# Altium PCB SG6841 12V 3A_2020-11-24_11-49-51.pcbdoc
Units mil, origin at the board's own origin, x right, y up, seen from the top; angles counter-clockwise.
Board outline 4160 x 3770 mil, 2 copper layers (Top Layer, Bottom Layer); 39 components, 40 nets, 97 pads, 0 vias.
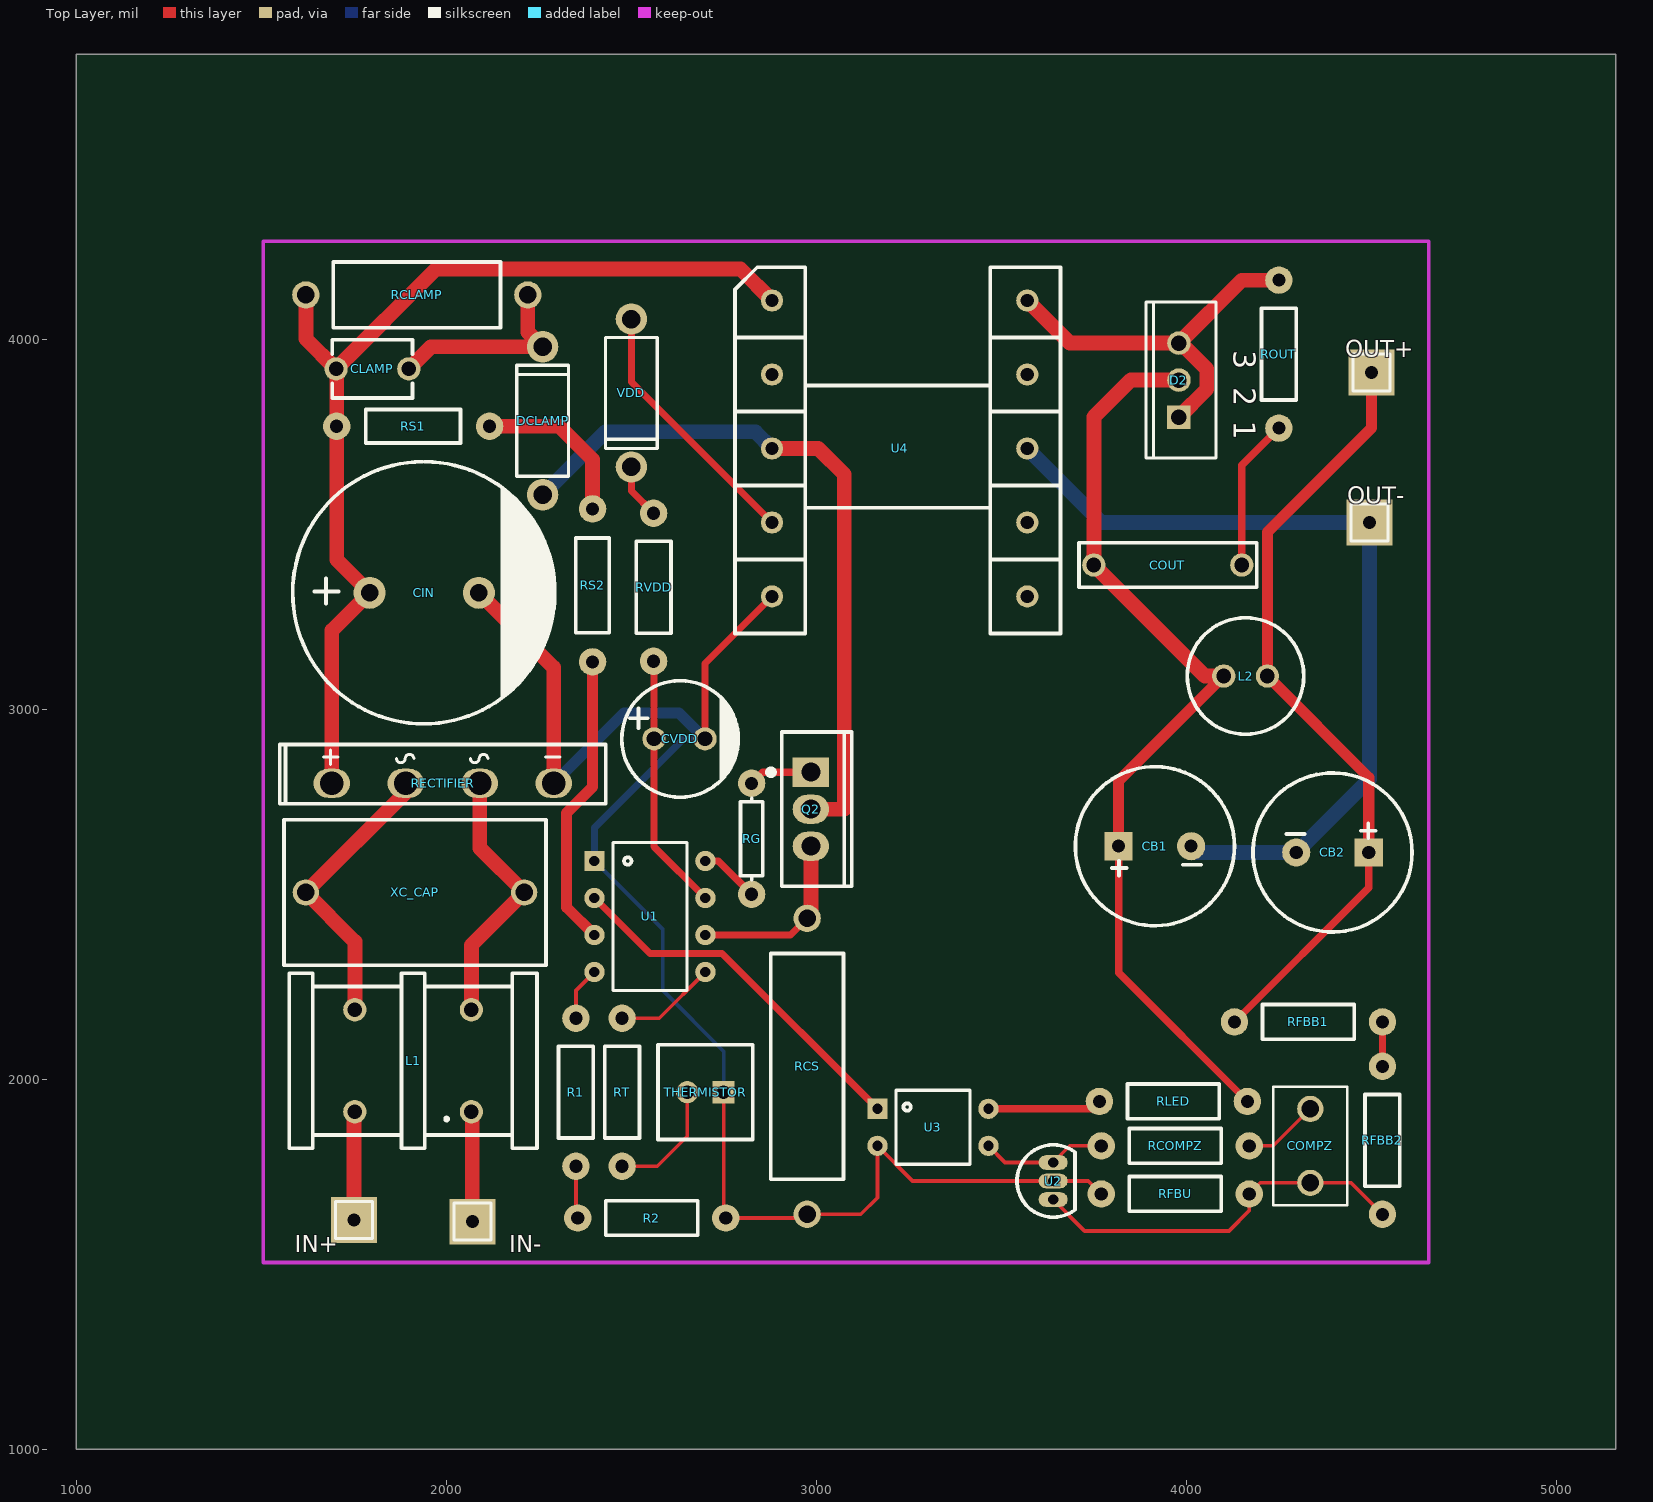
[diagram p0: Top Layer view]
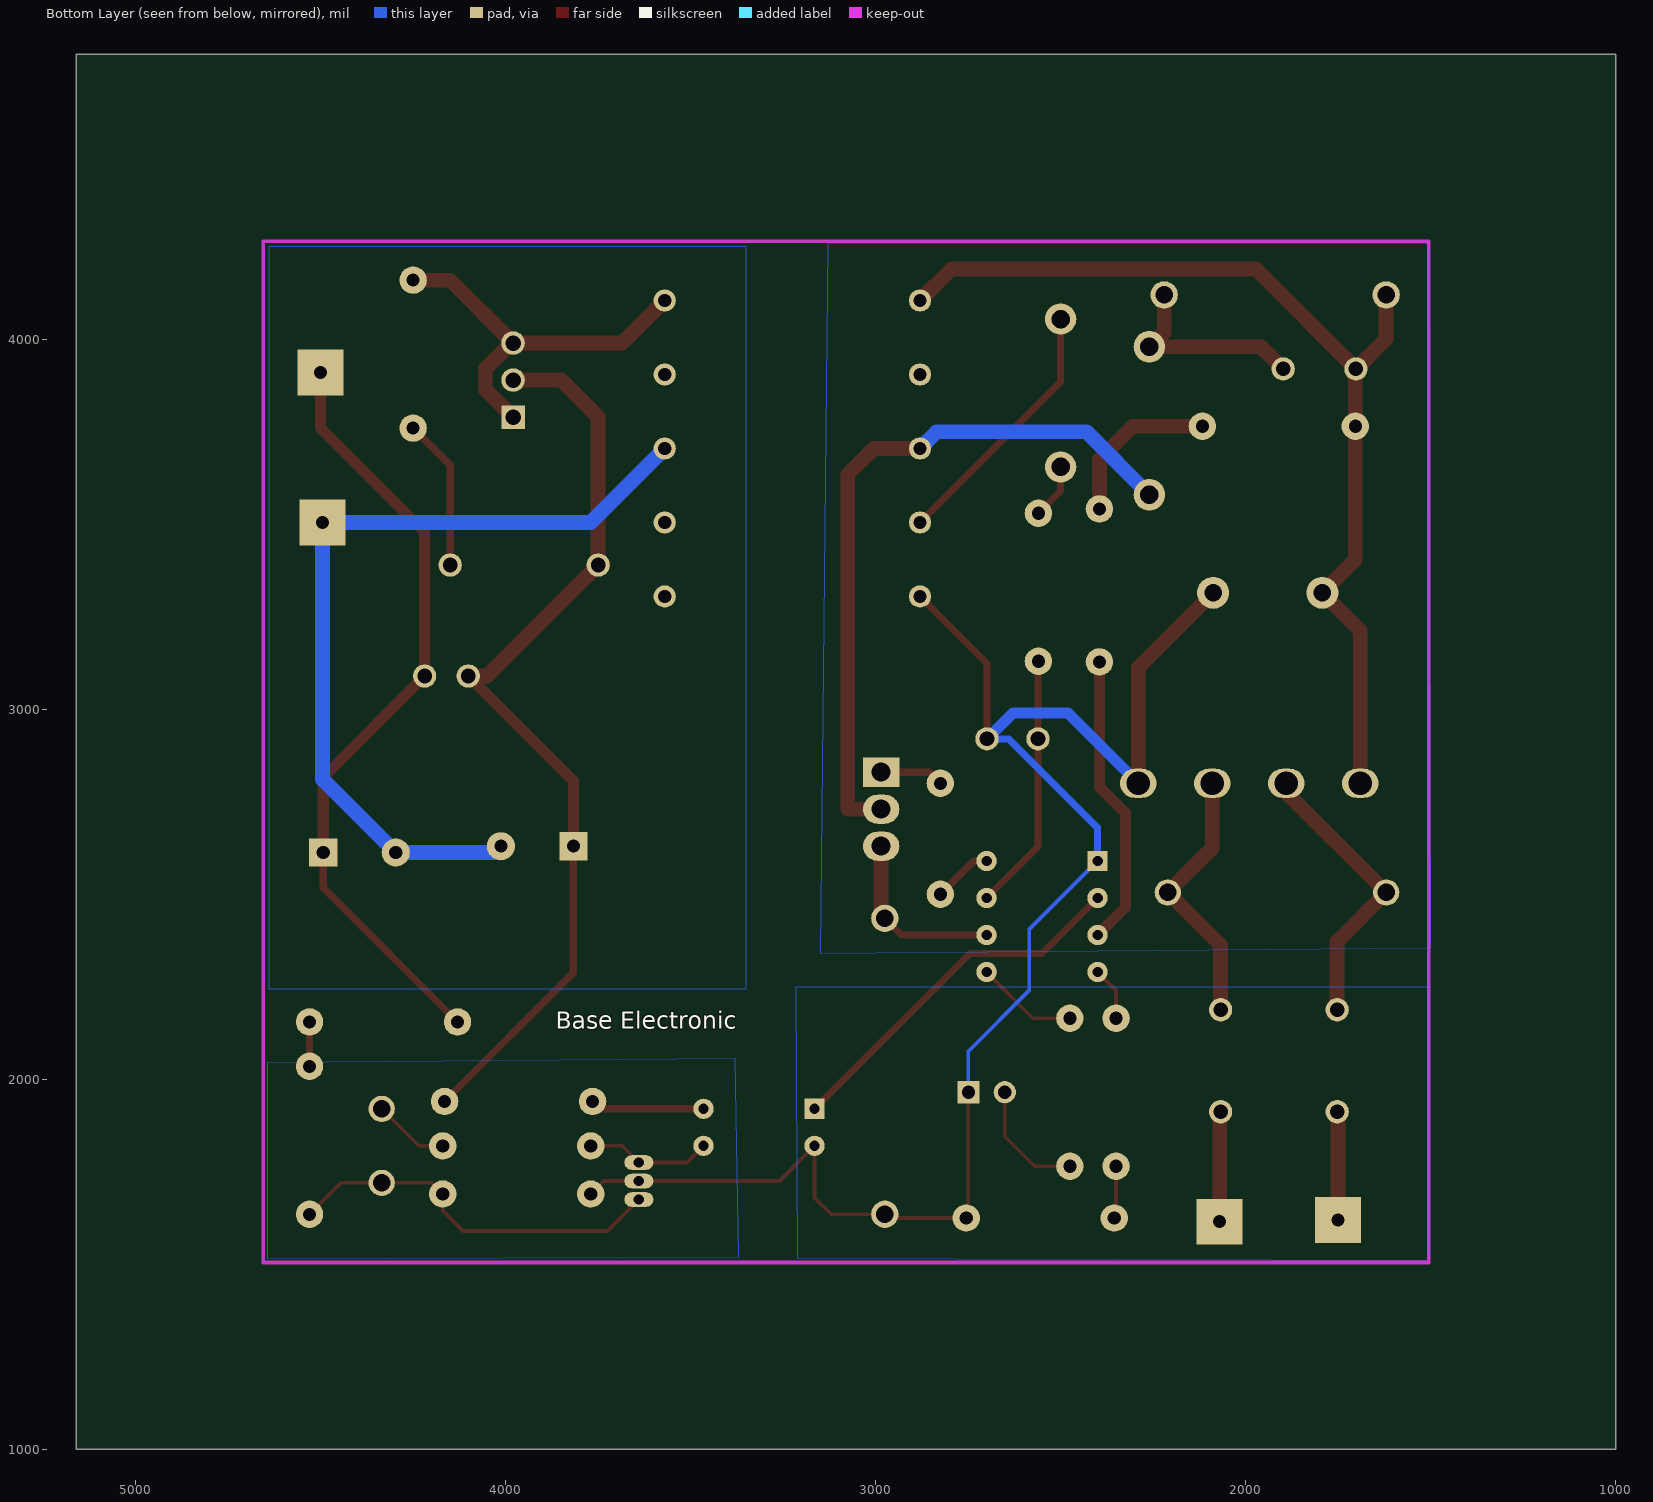
[diagram p1: Bottom Layer view, seen from below]

## Layer stack, top to bottom
Top Layer: signal copper (thickness not stored)
Dielectric: dielectric 12.6, FR-4, Dk 4.8
Bottom Layer: signal copper (thickness not stored)

## Board outline
5160,1000 1000,1000 1000,4770 5160,4770

## Components (designator, comment, footprint, x,y, rotation, side; value= is the part's Value field where it differs from the comment)
CB1 "1000UF" CPOL-RADIAL-1000UF-25V-KIT 3915,2630 r180 top
CB2 "1000UF" CPOL-RADIAL-1000UF-25V-KIT 4395,2613 r0 top
CIN "100uF" CAP-TH_BD18.0-P7.50-D1.2-FD 1940,3315 r0 top
CLAMP "222（2200pF）2KV" CAP-TH_L5.0-W4.0-P5.00-D1.0-FD 1800,3920 r180 top
COMPZ "100nF" RAD-0.2 4335,1820 r0 top
COUT "1000pF" CAP-12*3-10MM 3950,3390 r180 top
CVDD "220uF" CAP-TH_BD8.0-P3.50-D1.0-FD 2630,2920 r0 top
D2 "MBR20100CT-E3/4W" TO-220AB(TO-220-3) 3980,3890 r0 top
DCLAMP "FR157" DO-15 2260,3780 r90 top
IN+ "Header-Male" HDR-1X1/2.54 1750,1620 r0 top
IN- "Header-Male" HDR-1X1/2.54 2070,1615 r0 top
L1 "20mH" FILTER-TH_4P-L17.0-W12.0-P7.00-D0.6-S8.00 1910,2050 r90 top
L2 "10mH" IND-TH_BD8.0-P3.00-D0.6 4160,3090 r0 top
OUT+ "Header-Male2.1" HDR-1X1/2.54 4500,3910 r0 top
OUT- "Header-Male2" HDR-1X1/2.54 4495,3505 r0 top
Q2 "10N65" TO-220F(TO-220IS) 2985,2730 r0 top
R1 "16k" AXIAL-0.4 2350,1965 r90 top
R2 "10k" AXIAL-0.4 2555,1625 r180 top
RCLAMP "100k" AXIAL-0.6 1920,4120 r180 top
RCOMPZ "12k" AXIAL-0.4 3970,1820 r0 top
RCS "0.39" AXIAL-0.8 2975,2035 r90 top
RECTIFIER "GBU406" BRIDGE-GBU 1990,2800 r270 top
RFBB1 "36k" AXIAL-0.4 4330,2155 r180 top
RFBB2 "2.2k" AXIAL-0.4 4530,1835 r90 top
RFBU "10k" AXIAL-0.4 3970,1690 r0 top
RG "10" AXIAL-0.3 2825,2650 r90 top
RLED "1k" AXIAL-0.4 3965,1940 r0 top
ROUT "22" AXIAL-0.4 4250,3960 r270 top
RS1 "750K" RES-TH_BD2.3-L6.5-P10.50-D0.5 1910,3765 r180 top
RS2 "750K" RES-TH_BD2.3-L6.5-P10.50-D0.5 2395,3335 r90 top
RT "6.2k" AXIAL-0.4 2475,1965 r90 top
RVDD "4.7" AXIAL-0.4 2560,3330 r90 top
THERMISTOR "104K" RES-TH_L6.5-W4.0-P2.50-D0.5 2700,1965 r180 top
U1 "SG6841" DIP8 2400,2590 r270 top
U2 "TL431" TO-92(TO-92-3) 3640,1725 r180 top
U3 "PC817C" DIP4 3315,1870 r270 top
U4 "EE28_10_PIN" TRANSFORMER_EE28_10PIN 3570,4105 r0 top
VDD "FR157" DO-15 2500,3855 r270 top
XC_CAP "470nF" CAP-SAFE-18.0*10.0 1915,2505 r180 top

## Footprints (in the part's own frame and the unit in brackets; to place one, negate y for a bottom-side part, rotate by r counter-clockwise, add the part's x,y. Pads: shape width x height; smd on the part's side, far side on the other; paste and mask are expansions set on the pad)
AXIAL-0.3 [mil]
  round 74 hole 35.4: 1(-150,0) 2(150,0)
  silkscreen extent -110,-30 110,30
AXIAL-0.4 [mil]
  round 74 hole 35.4: 1(-200,0) 2(200,0)
  silkscreen extent -124,-47 124,47
AXIAL-0.6 [mil]
  round 74 hole 47.2: 1(-300,0) 2(300,0)
  silkscreen extent -226,-89 226,89
AXIAL-0.8 [mil]
  round 74 hole 47.2: 1(-400,0) 2(400,0)
  silkscreen extent -305,-98 305,98
BRIDGE-GBU [mm]
  oval 2x2.5 hole 1.6: 1(0,2.54) 2(0,-7.62) 3(0,-2.54) 4(0,7.62)
  silkscreen extent -2.67,-11.2 1.4,11.2
CAP-12*3-10MM [mm]
  round 1.6 hole 1: 1(-5.08,0) 2(5.08,0)
  silkscreen extent -6.1,-1.52 6.1,1.52
CAP-SAFE-18.0*10.0 [mm]
  round 1.8 hole 1.2: 1(-7.5,0) 2(7.5,0)
  silkscreen extent -9,-5 9,5
CAP-TH_BD8.0-P3.50-D1.0-FD [mm]
  round 1.6 hole 1: 1(-1.75,0) 2(1.75,0)
  silkscreen extent -3.96,-4 4.04,4
CAP-TH_BD18.0-P7.50-D1.2-FD [mm]
  round 2.2 hole 1.2: 1(-3.75,0) 2(3.75,0)
  silkscreen extent -9.03,-9 9,9
CAP-TH_L5.0-W4.0-P5.00-D1.0-FD [mm]
  round 1.6 hole 1: 1(-2.499,0) 2(2.499,0)
  silkscreen extent -2.75,-2.01 2.75,1.99
CPOL-RADIAL-1000UF-25V-KIT [mil]
  rect 76x76 hole 35.4: +(98,0)
  round 76 hole 35.4: -(-98,0)
  silkscreen extent -215,-215 215,215
DIP4 [mil]
  rect 55x55 hole 28: 1(-50,-150)
  round 55 hole 28: 2(50,-150) 3(50,150) 4(-50,150)
  silkscreen extent -100,-100 100,100
DIP8 [mil]
  rect 55x55 hole 28: 1(0,0)
  round 55 hole 28: 2(100,0) 3(200,0) 4(300,0) 5(300,300) 6(200,300) 7(100,300) 8(0,300)
  silkscreen extent -50,50 350,250
DO-15 [mil]
  round 85 hole 50: 1(-200,0) 2(200,0)
  silkscreen extent -150,-70 150,70
FILTER-TH_4P-L17.0-W12.0-P7.00-D0.6-S8.00 [mm]
  round 1.6 hole 1: 1(-3.5,-4) 2(3.5,-4) 3(3.5,4) 4(-3.5,4)
  silkscreen extent -6,-8.5 6,8.5
HDR-1X1/2.54 [mm]
  rect 3.15x3.15 hole 0.889: 1(0,0)
  silkscreen extent -1.27,-1.27 1.27,1.27
IND-TH_BD8.0-P3.00-D0.6 [mm]
  round 1.6 hole 1: 1(-1.5,0) 2(1.5,0)
  silkscreen extent -4,-4 4,4
RAD-0.2 [mm]
  round 1.8 hole 1.2: 1(0,2.54) 2(0,-2.54)
  silkscreen extent -2.54,-4.06 2.54,4.06
RES-TH_BD2.3-L6.5-P10.50-D0.5 [mil]
  round 74 hole 35.4: 1(-206.69,0) 2(206.69,0)
  silkscreen extent -128,-45 128,45
RES-TH_L6.5-W4.0-P2.50-D0.5 [mil]
  rect 60x60 hole 35.43: 1(-49.21,0)
  round 60 hole 35.43: 2(49.21,0)
  silkscreen extent -128,-128 128,128
TO-92(TO-92-3) [mm]
  oval 1.999x1 hole 0.7: 1(0,1.27) 2(0,0) 3(0,-1.27)
  silkscreen extent -1.5,-2.48 2.48,2.48
TO-220AB(TO-220-3) [mil]
  rect 63.5x63.5 hole 42: 1(0,-100)
  round 63.5 hole 42: 2(0,0) 3(0,100)
  silkscreen extent -89,-211 100,211
TO-220F(TO-220IS) [mm]
  rect 2.5x2 hole 1.3: 1(0,2.54)
  oval 2.5x2 hole 1.3: 2(0,0) 3(0,-2.54)
  silkscreen extent -2.94,-5.3 2.8,5.3
TRANSFORMER_EE28_10PIN [mil]
  round 60 hole 36: 1(-690,0) 2(-690,-200) 3(-690,-400) 4(-690,-600) 5(-690,-800) 6(0,-800) 7(0,-600) 8(0,-400) 9(0,-200) 10(0,0)
  silkscreen extent -790,-900 90,90

## Nets (pads, with @x,y where several pads share a name; then routed paths per layer and width w, separated by ;. In a path a pad name is that pad's centre, name@x,y a point inside that pad or via, vN(x,y) a via of type N, cw(c..) or ccw(c..) an arc to the next point about the centre after c; other vN are vias at no path point)
CB1_+: CB1.+ COUT.2 D2.2 L2.1 RLED.2 | length 2558.4
  Top Layer w19.68: CB1.+ 3817,2288 RLED.2
  Top Layer w29.92: CB1.+ 3817,2806.05 L2.1@4100.95,3090
  Top Layer w40: D2.2 3850,3890 3750,3790 COUT.2 4050,3090 L2.1@4100.95,3090
CB2_+: CB2.+ L2.2 OUT+.1 RFBB1.2 | length 2135.2
  Top Layer w19.68: RFBB1.2 4493,2518 CB2.+
  Top Layer w29.92: L2.2 4493,2816.06 CB2.+ ; L2.2 4219.1,3479.1 4500,3760 OUT+.1
DCLAMP_1: DCLAMP.1 Q2.2 U4.3 | length 1928.1
  Top Layer w40: U4.3 3005,3705 3075,3635 3075,2730 Q2.2
  Bottom Layer w40: DCLAMP.1 2430,3750 2835,3750 U4.3
DCLAMP_2: CLAMP.1 DCLAMP.2 RCLAMP.1 | length 543
  Top Layer w40: CLAMP.1 1958.4,3980 DCLAMP.2 2220,4020 RCLAMP.1
GND: CIN.2 CVDD.2 R2.1 RCS.1 RECTIFIER.4 RFBU.1 THERMISTOR.1 U1.1 U2.2 U3.2 U4.5 | length 4407.4
  Top Layer w10: THERMISTOR.1 2749.21,1630.79 R2.1 2965,1625 RCS.1 3120,1635 3165,1680 U3.2 3260,1725 U2.2 3735,1725 RFBU.1
  Top Layer w19.68: CVDD.2 2698.9,3123.9 U4.5
  Top Layer w40: CIN.2 2290,3112.64 RECTIFIER.4
  Bottom Layer w10: U1.1 2585,2405 2585,2240 2749.2,2075.8 THERMISTOR.1
  Bottom Layer w19.68: U1.1 2400,2680 2640,2920 CVDD.2
  Bottom Layer w29.92: RECTIFIER.4 2480,2990 2628.9,2990 CVDD.2
L1_1: IN-.1 L1.1 | length 298.2
  Top Layer w39.96: L1.1 2070,1909.7 IN-.1
L1_4: IN+.1 L1.4 | length 293.2
  Top Layer w39.96: IN+.1 1750,1909.7 L1.4
Q2_1: Q2.1 RG.2 | length 172.4
  Top Layer w19.68: RG.2 2855,2830 Q2.1
R1_1: R1.1 R2.2 | length 142.1
  Top Layer w10: R1.1 2350,1630 R2.2
RCOMPZ_2: COMPZ.1 RCOMPZ.2 | length 206.4
  Top Layer w10: RCOMPZ.2 4235,1820 COMPZ.1
RECTIFIER_1: L1.2 RECTIFIER.1 XC_CAP.1 | length 721.2
  Top Layer w40: L1.2 2067.5,2362.23 XC_CAP.1 2090,2625.27 RECTIFIER.1
RECTIFIER_2: CIN.1 CLAMP.2 RCLAMP.2 RECTIFIER.2 RS1.2 U4.1 | length 2759.2
  Top Layer w40: RCLAMP.2 1620,4001.6 CLAMP.2 ; RECTIFIER.2 1690,3212.64 CIN.1 1703.31,3404.05 RS1.2 1703.31,3918.29 CLAMP.2 ; U4.1 2795,4190 1971.6,4190 CLAMP.2
RECTIFIER_3: L1.3 RECTIFIER.3 XC_CAP.2 | length 779.2
  Top Layer w40: L1.3 1752.5,2372.22 XC_CAP.2 1890,2775.28 RECTIFIER.3
RFBB1_1: RFBB1.1 RFBB2.2 | length 120
  Top Layer w19.68: RFBB2.2 RFBB1.1
ROUT_2: COUT.1 ROUT.2 | length 411.4
  Top Layer w19.68: COUT.1 4150,3660 ROUT.2
RS2_1: RS2.1 U1.3 | length 798.4
  Top Layer w29.92: RS2.1 2395,2790 2325,2720 2325,2465 U1.3
RS2_2: RS1.1 RS2.2 | length 448.9
  Top Layer w40: RS1.1 2305,3765 2395,3675 RS2.2
RT_1: RT.1 THERMISTOR.2 | length 328.5
  Top Layer w10: RT.1 2570,1765 2650.8,1845.8 THERMISTOR.2
RVDD_2: RVDD.2 VDD.2 | length 149.9
  Top Layer w19.68: VDD.2 2500,3590 RVDD.2
S$6: 
S$8: 
S$118: 
S$120: 
S$122: 
S$124: 
S$128: 
S$131: 
U1_2: U1.2 U3.1 | length 1001.1
  Top Layer w19.68: U1.2 2550,2340 2745,2340 U3.1
U1_4: R1.2 U1.4 | length 145.7
  Top Layer w10: R1.2 2350,2240 U1.4
U1_5: RT.2 U1.5 | length 276.8
  Top Layer w10: RT.2 2575,2165 U1.5
U1_6: Q2.3 RCS.2 U1.6 | length 492.8
  Top Layer w19.68: U1.6 2930,2390 RCS.2
  Top Layer w40: RCS.2 2985,2445 Q2.3
U1_7: CVDD.1 RVDD.1 U1.7 | length 698
  Top Layer w19.68: RVDD.1 2561.1,3128.9 CVDD.1 2561.1,2628.9 U1.7
U1_8: RG.1 U1.8 | length 162.3
  Top Layer w19.68: U1.8 2735,2590 RG.1
U2_1: COMPZ.2 RFBB2.1 RFBU.2 U2.1 | length 1040.6
  Top Layer w10: U2.1 3725,1590 4115,1590 4170,1645 RFBU.2 4200,1720 COMPZ.2 4445,1720 RFBB2.1
U2_3: RCOMPZ.1 U2.3 U3.3 | length 342.3
  Top Layer w10: U3.3 3510,1775 U2.3 3685,1820 RCOMPZ.1
U3_4: RLED.1 U3.4 | length 308.3
  Top Layer w19.68: U3.4 3745,1920 RLED.1
U4_4: U4.4 VDD.1 | length 707.4
  Top Layer w19.68: VDD.1 2500,3885 U4.4
U4_8: CB1.- CB2.- OUT-.1 U4.8 | length 2272.9
  Bottom Layer w40: U4.8 3770,3505 OUT-.1 4495,2811 CB2.- 4030,2613 CB1.-
U4_10: D2.1 D2.3 ROUT.1 U4.10 | length 1063.1
  Top Layer w40: U4.10 3685,3990 D2.3 ; D2.1 4055,3865 4055,3920 3985,3990 D2.3 ; ROUT.1 4150,4160 D2.3
UNDEFINED: 
pads on no net: U4.2 U4.6 U4.7 U4.9

## Polygon pours and split planes (outlines as drawn)
GND on Bottom Layer (solid): 1505,4260 3130,4260 3150,2340 1500,2355
GND on Bottom Layer (solid): 3380,2055 4645,2045 4645,1515 3370,1520
GND on Bottom Layer (solid): 3215,2250 1505,2250 1505,1510 3210,1515
GND on Bottom Layer (solid): 4640,4250 4640,2245 3350,2245 3350,4250

## Silkscreen, mask and mechanical layers (free items; w line width, h text height)
Bottom Overlay:
  text "Base Electronic" at 3865,2120 h80
Document:
  lines w0.1: 3079,2884 3081,2886

## Text inside footprints (layer, text, board x,y; h text height)
D2: Top Overlay "1" at 4128.45,3780 h59.1 r270; Top Overlay "2" at 4128.45,3870 h59.1 r270; Top Overlay "3" at 4128.45,3970 h59.1 r270